# Altium PCB NE555.PcbDoc
Units mil, origin at the board's own origin, x right, y up, seen from the top; angles counter-clockwise.
Board outline 1706.6 x 1131.85 mil, 2 copper layers (Top Layer, Bottom Layer); 14 components, 9 nets, 33 pads, 4 vias.
Unrouted connection lines stored in the file: 4.
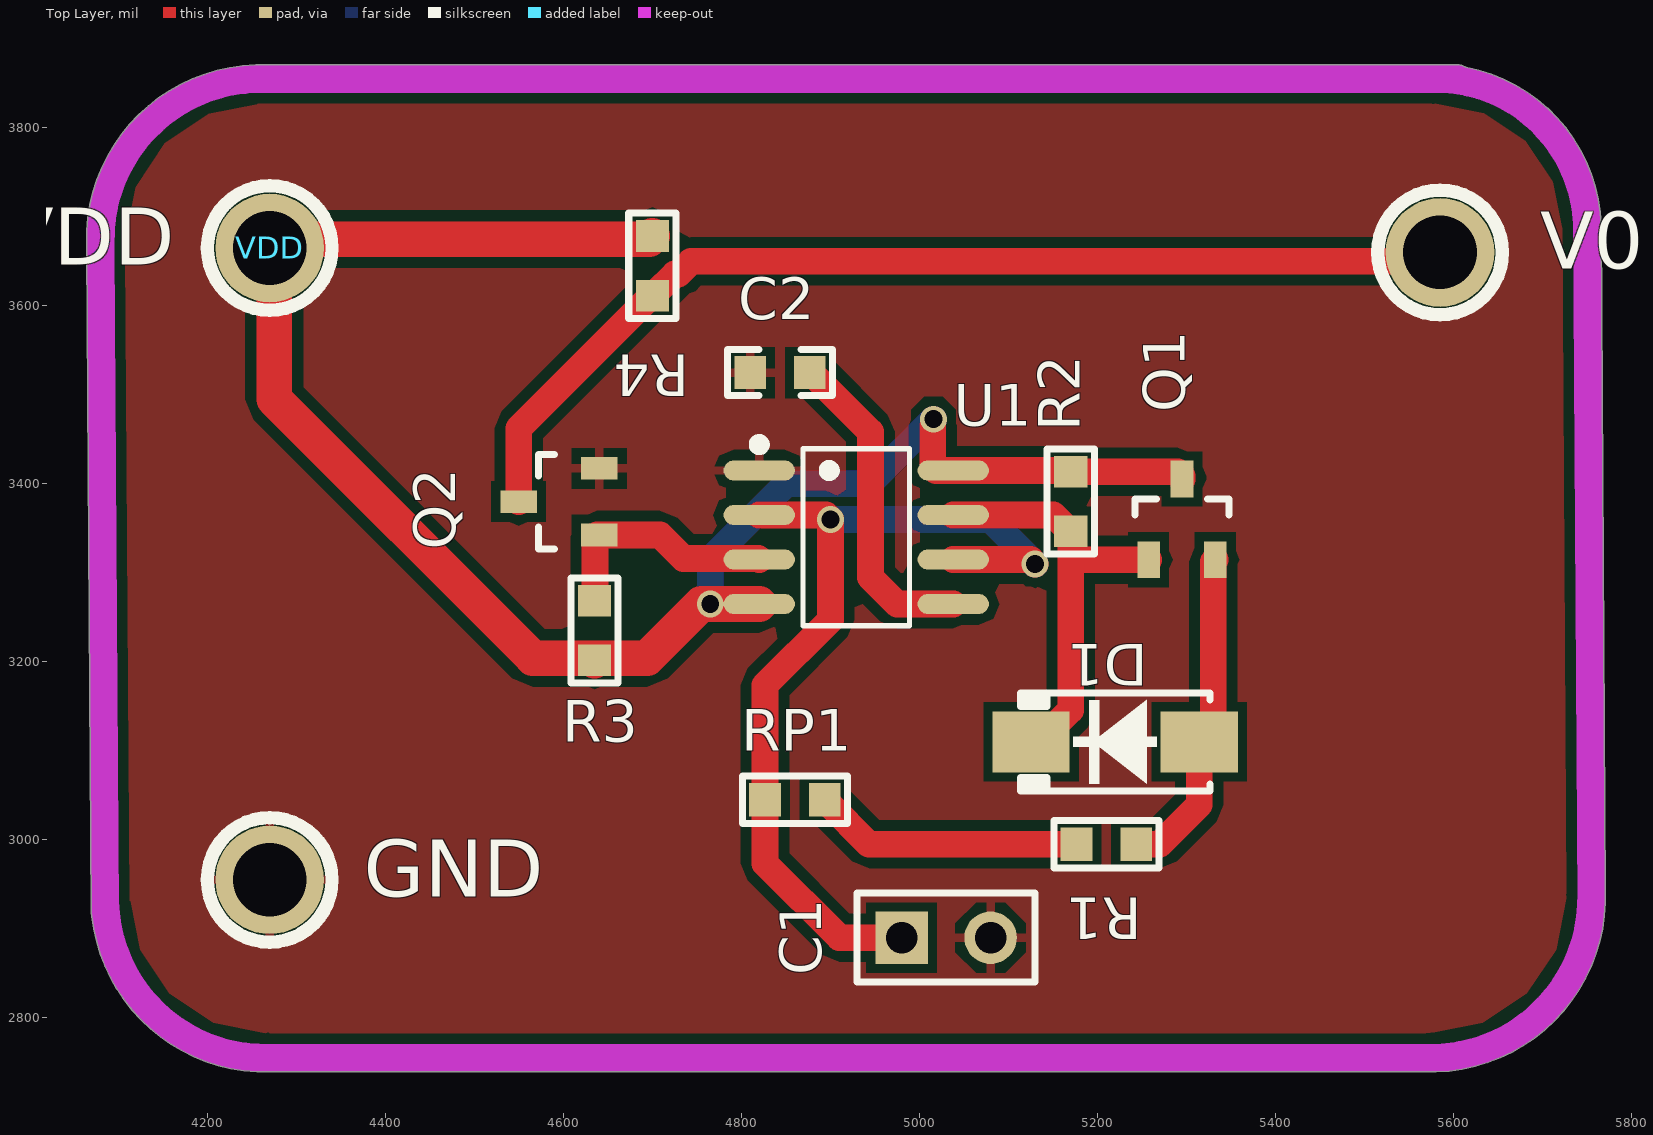
[diagram p0: Top Layer view]
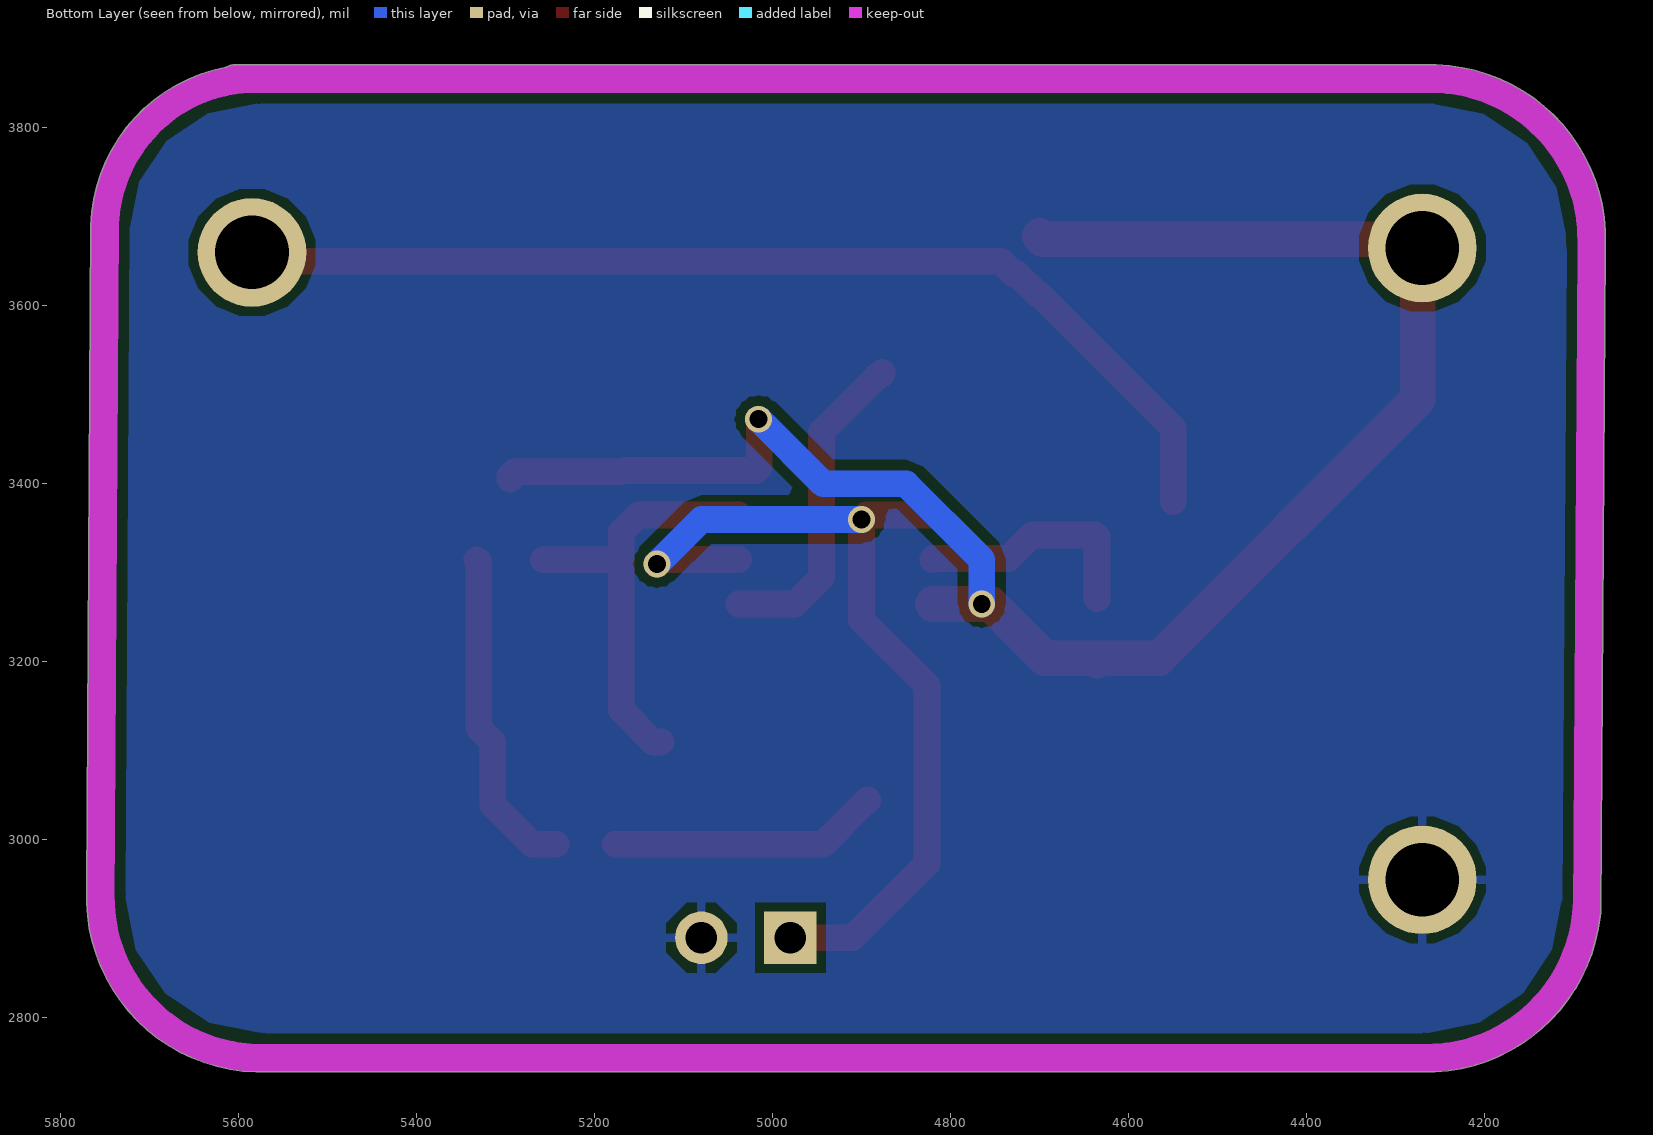
[diagram p1: Bottom Layer view, seen from below]
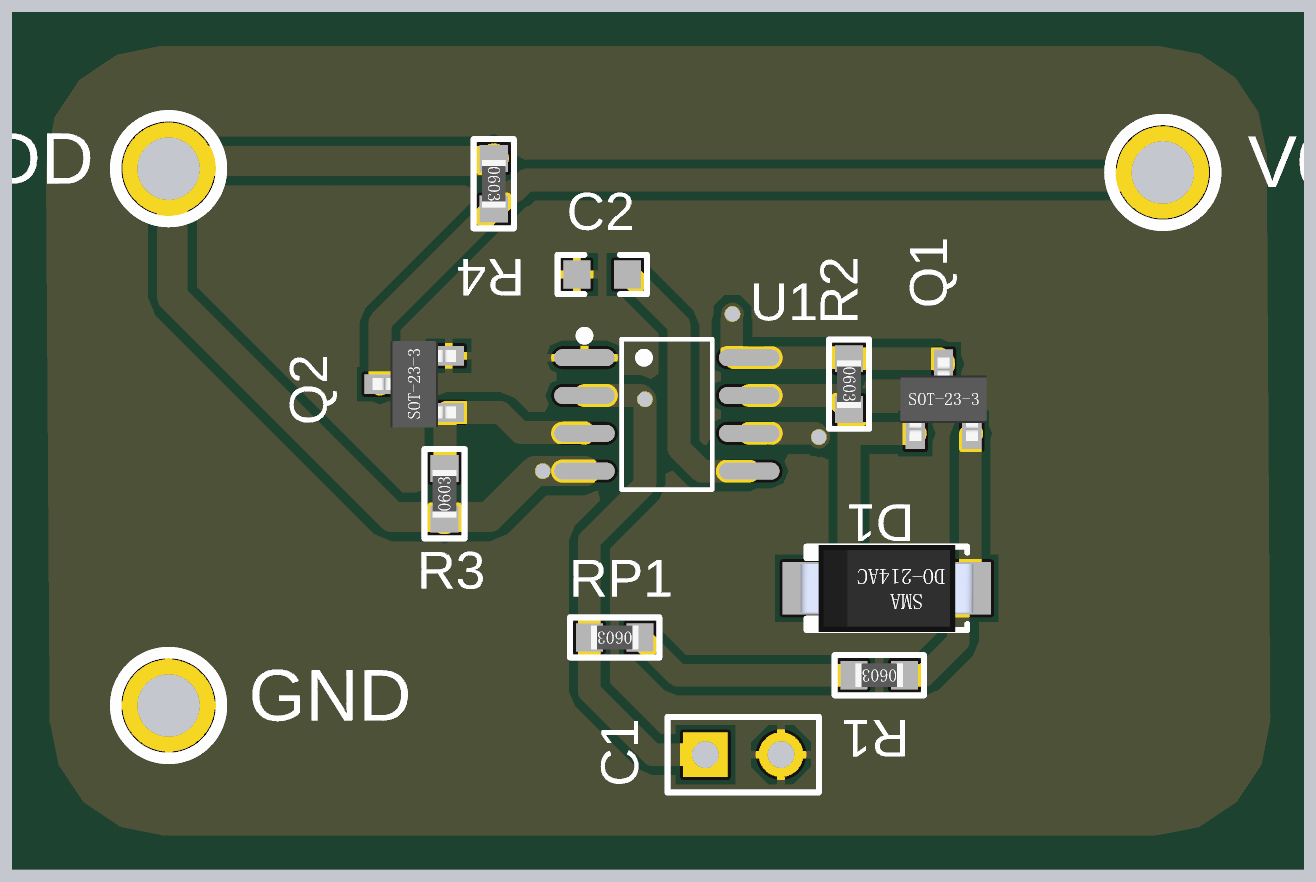
[diagram p2: 3D render of the assembled board from above, using the file's embedded part models]

## Layer stack, top to bottom
Top Solder: solder mask 0.4, Solder Resist, Dk 3.5
Top Layer: signal copper 1.4
Dielectric 1: dielectric 12.6, FR-4, Dk 4.8
Bottom Layer: signal copper 1.4
Bottom Solder: solder mask 0.4, Solder Resist, Dk 3.5

## Board outline
4069.24,2919.89 4064.24,3664.89 cw(c4080,3665) 4064.44,3667.5 cw(c4080,3670) 4064.24,3669.56 cw(c4260,3675) 4254.56,3870.76 cw(c4255,3855) 4255.1,3870.76 5564.77,3870.76 5574.68,3871.04 cw(c5575.14,3855.28) 5574.71,3871.04 cw(c5579.88,3684.89) 5591.25,3870.76 5605,3870.76 cw(c5605,3855) 5613.97,3867.96 cw(c5579.88,3684.89) 5766.02,3690.06 cw(c5750.27,3689.63) 5766.03,3689.72 5770.69,2941.5 cw(c5755,2940) 5770.76,2940.44 cw(c5575,2935) 5770.83,2935 cw(c5575,2935) 5770.76,2929.56 cw(c5575,2935) 5580.44,2739.24 cw(c5580,2755) 5577.5,2739.44 cw(c5575,2755) 5575,2739.24 4270.16,2739.24 cw(c4265,2935) 4070.25,2914.44 cw(c4085,2920)

## Design rules (kind name [scope] priority, off if disabled: settings)
Clearance [All] p1: gap=10 ignorepadtopadclearanceinfootprint=FALSE except(0: Arc-Hole Track-Hole SMDPad-Hole THPad-Hole Via-Hole Fill-Hole Poly-Hole Region-Hole Text-Hole)
PolygonConnect [All] p1: connectstyle=Relief reliefconductorwidth=10 reliefentries=4 polygonreliefangle="90 Angle" airgapwidth=10
RoutingVias [All] p1: holewidth=28 width=50 viastyle="Through Hole" minholewidth=28 minwidth=50 maxholewidth=28 maxwidth=50
SolderMaskExpansion [All] p1: expansion=4 istentingtop=FALSE
Width [All] p1: maxlimit=50 minlimit=10 preferedwidth=30
30 further rules are at their usual default settings.

## Components (designator, comment, footprint, x,y, rotation, side; value= is the part's Value field where it differs from the comment)
C1 "100nF ±10% 50V" HDR1X2 4980,2890 r0 top value=100nF
C2 "100nF ±10% 50V" CAPC1608[0603]S-N 4843.46,3525 r0 top value=100nF
D1 "SS54" SMA[DO-214AC] 5220,3110 r180 top
GND "铜柱" 铜柱 4270,2955 r0 top
Q1 "NPN" SOT-23 5295,3360 r90 top
Q2 "S8050" SOT-23 4595,3380 r180 top
R1 "75KΩ (7502) ±1%" RESC1608[0603]S-N 5210,2995 r180 top
R2 "5.1KΩ (5101) ±1%" RESC1608[0603]S-N 5170,3380 r270 top
R3 "1K ±1%" RESC1608[0603]S-N 4635,3235 r90 top value=1K
R4 "1K ±1%" RESC1608[0603]S-N 4700,3645 r270 top value=1K
RP1 "75KΩ (7502) ±1%" RESC1608[0603]S-N 4860,3045 r180 top
U1 "NE555DR" NE555DR 4925,3350 r270 top
V0 "铜柱" 铜柱 5585,3660 r0 top
VDD "铜柱" 铜柱 4270,3665 r0 top

## Footprints (in the part's own frame and the unit in brackets; to place one, negate y for a bottom-side part, rotate by r counter-clockwise, add the part's x,y. Pads: shape width x height; smd on the part's side, far side on the other; paste and mask are expansions set on the pad)
CAPC1608[0603]S-N [mm]
  rect 0.9x0.95 smd: 1(-0.85,0) 2(0.85,0)
  silkscreen extent -1.5,-0.66 1.5,0.66, body extent -0.8,-0.41 0.8,0.41, height 0.79
HDR1X2 [mm] "Connector; Header; 2 Position"
  rect 1.5x1.5 hole 0.9: 1(0,0)
  round 1.5 hole 0.9: 2(2.54,0)
  silkscreen extent -1.27,-1.27 3.81,1.27
NE555DR [mil] "SOP-8"
  oval 22.6x80.14 smd: 1(-64.98,-104.93) 2(-14.98,-104.93) 3(35.02,-104.93) 4(85.02,-104.93) 5(85.02,113) 6(35.02,113) 7(-14.98,113) 8(-64.98,113)
  silkscreen extent -100,-111 109,64
RESC1608[0603]S-N [mm]
  rect 0.9x0.95 smd: 1(-0.85,0) 2(0.85,0)
  silkscreen extent -1.5,-0.67 1.5,0.67, body extent -0.8,-0.4 0.8,0.4, height 0.45
SMA[DO-214AC] [mm]
  rect 2.2x1.75 smd: A(-2.4,0) K(2.4,0)
  silkscreen extent -2.7,-1.4 2.7,1.4, body extent -2.9,-1.46 2.91,1.46, height 2.3
SOT-23 [mm]
  rect 1.05x0.65 smd: 1(-1.15,0.95) 2(-1.15,-0.95) 3(1.15,0)
  silkscreen extent 0.13,-1.35 0.58,1.35, body extent -1.4,-1.45 1.4,1.45, height 1.2
铜柱 [mm]
  round 3.1 hole 2.1: 1(0,0)
  silkscreen extent -1.78,-1.78 1.78,1.78, body extent -1.6,-1.6 1.6,1.6, height 2.54

## Part data
C1 C2: library part Cap-Chip_1, "贴片电容", Tolerance=±10%, Voltage=50V, Price(RMB)=0.000, Published=8-Jun-2000, Publisher="Altium Limited", Revision="July-2002: Re-released for DXP Platform."
D1: library part Diode, "普通二极管 Diode", Imax=500mA, Price(RMB)=0.000, Published=8-Jun-2000, Publisher="Altium Limited", Revision="July-2002: Re-released for DXP Platform."
GND V0 VDD: "2.1mm"
Q1 Q2: library part "NPN S8050", "Discrete NPN Bipolar Transistor", Price(RMB)=0.000, Published=8-Jun-2000, Publisher="Altium Limited", Revision="July-2002: Re-released for DXP Platform."
  Q1: PartNumber=NPN
  Q2: PartNumber=S8050
R1 RP1: library part "0603 75KΩ (7502) 1%", "贴片电阻", Package=0603, SuppliersPartNumber=C23242, ComponentLink1Description=供应商链接, ComponentLink1URL=http://www.szlcsc.com/product/details_23969.html, Supplier=LC
R2: library part "0603 5.1KΩ (5101) 1%", "贴片电阻", Package=0603, SuppliersPartNumber=C23186, ComponentLink1Description=供应商链接, ComponentLink1URL=http://www.szlcsc.com/product/details_23913.html, Supplier=LC
R3 R4: library part Res-Chip_2, "贴片电阻", Tolerance=±1%, Price(RMB)=0.000, Published=8-Jun-2000, Publisher="Altium Limited", Revision="July-2002: Re-released for DXP Platform."
U1: library part NE555DR_[C7593], "时基集成", Package=SOIC-8_150mil, SuppliersPartNumber=C7593, ComponentLink1Description=供应商链接, ComponentLink1URL=http://www.szlcsc.com/product/details_8070.html, Supplier=LC

## Via types
v1: diameter 30, hole 20, Top Layer to Bottom Layer, tented both sides, 4 vias

## Nets (pads, with @x,y where several pads share a name; then routed paths per layer and width w, separated by ;. In a path a pad name is that pad's centre, name@x,y a point inside that pad or via, vN(x,y) a via of type N, cw(c..) or ccw(c..) an arc to the next point about the centre after c; other vN are vias at no path point)
GND: C1.2 C2.1 GND.1 Q2.2 U1.1
NetC1_1: C1.1 RP1.2 U1.2 U1.6 | length 1031.8
  Top Layer w30: U1.2 4895.02,3364.98 v1(4900.01,3359.99) 4900.01,3247.23 4826.54,3173.76 RP1.2 4826.54,2973.46 4910,2890 C1.1 ; U1.6 5125.02,3314.98 v1(5130,3310)
  Bottom Layer w30: v1(4900.01,3359.99) 5080.01,3359.99 v1(5130,3310)
NetC2_2: C2.2 U1.5 | length 365.1
  Top Layer w30: C2.2 4876.93,3524.02 4879.65,3521.3 4882.13,3521.3 4945,3458.43 4945,3295 4975,3265 U1.5
NetD1_A: D1.A Q1.2 R1.1 | length 372.1
  Top Layer w30: R1.1 5270,2995 5314.49,3039.49 D1.A 5330.2,3125.71 5330.2,3312.52 Q1.2
NetD1_K: D1.K Q1.1 R2.2 U1.7 | length 487.4
  Top Layer w30: U1.7 5150.57,3364.98 5169.02,3346.54 R2.2 5170,3314.72 ; D1.K 5134.37,3110 5170,3145.63 5170,3314.72 ; Q1.1 5170,3314.72
NetQ1_3: Q1.3 R2.1 R3.1 R4.1 U1.4 U1.8 VDD.1 | length 1993.7
  Top Layer w30: v1@5015,3465 5015,3418.68 5018.7,3414.98 U1.8 R2.1@5165.53,3414.98 ; R2.1 5290.28,3413.46 5295,3408.74 Q1.3
  Top Layer w40: R3.1 4632.28,3204.25 4565.75,3204.25 4275,3495 4275,3675 4696.54,3675 R4.1 ; R3.1@4635,3203.07 4636.18,3204.25 4694.25,3204.25 4755,3265 v1(4765,3265) U1.4@4820.05,3265
  Bottom Layer w30: v1(4765,3265) 4765,3315 4850,3400 4943.09,3400 v1(5015.8,3472.71)
NetQ2_1: Q2.1 R3.2 U1.3 | length 266.1
  Top Layer w30: R3.2@4635.49,3271.18 4635.49,3340.39 4637.7,3342.6 4708.51,3342.6 4735,3316.11 4818.94,3316.11 U1.3
NetQ2_3: Q2.3 R4.2 V0.1 | length 1199.4
  Top Layer w30: Q2.3 4549.72,3462.24 4699.02,3611.54 R4.2 4702.72,3614.25 4703.7,3614.25 4725.2,3635.75 4729.06,3635.75 4743.31,3650 5575,3650 V0.1
NetR1_2: R1.2 RP1.1 | length 304.4
  Top Layer w30: RP1.1 4893.46,3044.02 4896.18,3041.3 4897.17,3041.3 4943.46,2995 R1.2

## Polygon pours and split planes (outlines as drawn)
GND on Top Layer "NONET_L-01_P-001" (solid, remove dead copper, pour order 0): 4230,3860 5665,3860 5770,3755 5765,3750 5765,2845 5660,2740 5645,2755 4215,2755 4070,2900 4085,2915 4085,3750 4200,3865
GND on Bottom Layer "NONET_L-01_P-001" (solid, remove dead copper, pour order 1): 4185,3850 4195,3840 5635,3840 5760,3715 5760,2880 5630,2750 5625,2755 4220,2755 4220,2765 4080,2905 4090,2915 4090,3735

## Keep-outs
Keep-Out Layer:
  lines w31.5: 4080,3665 4085,2920 ; 4080,3670 cw(c4260,3675) 4255,3855 5605,3855 ; 4085,2930 ccw(c4265,2935) 4270,2755 4596.25,2755 ; 5565,3855 5575.14,3855.28 cw(c5579.88,3684.89) 5750.27,3689.63 5755,2930 ; 5575,2755 5248.75,2755 4596.25,2755 ; 5580,2755 ccw(c5575,2935) 5755,2940 ; 4596.25,2755 4596.25,2755